# Altium PCB det.PcbDoc
Units mm, origin at the board's own origin, x right, y up, seen from the top; angles counter-clockwise.
Board outline 25 x 21 mm, 2 copper layers (Top Layer, Bottom Layer), stack 0.581 mm thick; 16 components, 7 nets, 43 pads, 27 vias.
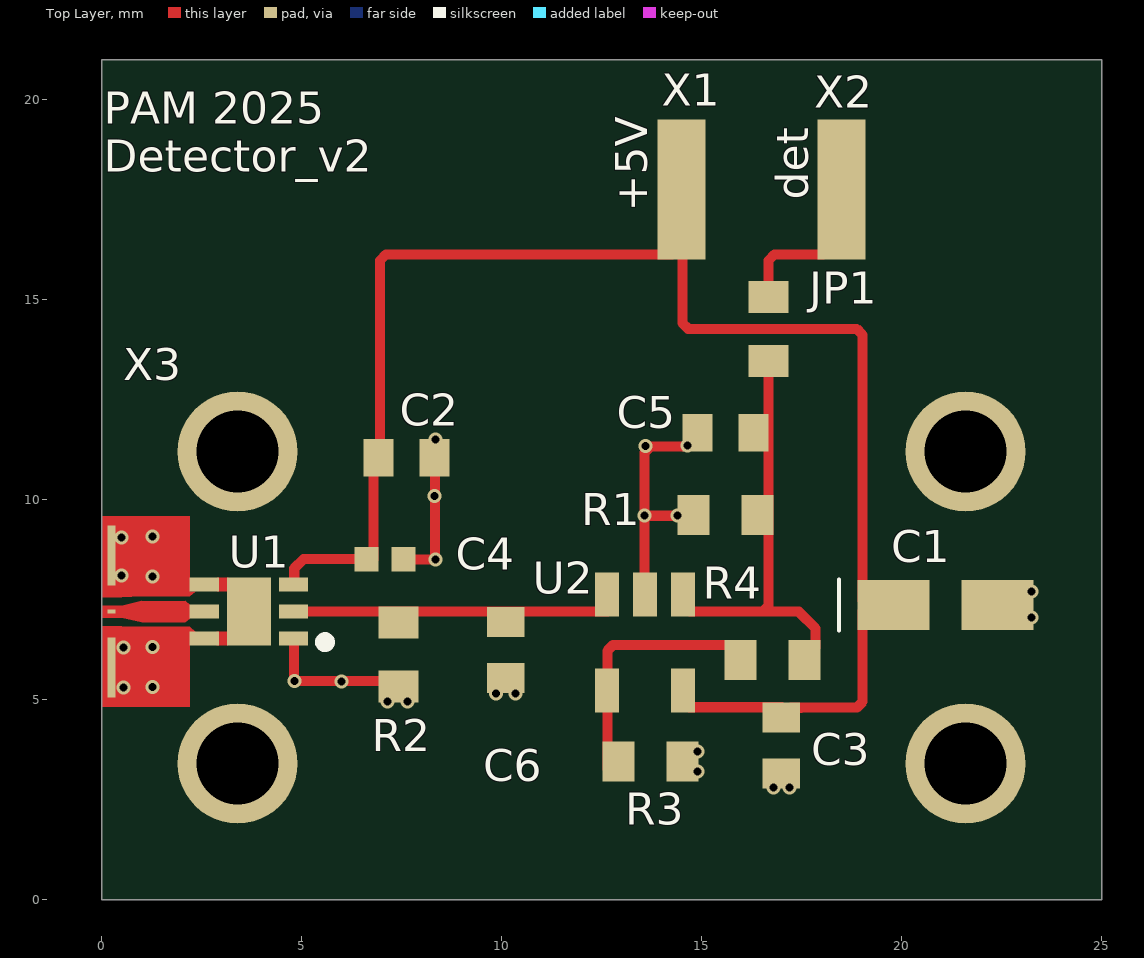
[diagram p0: Top Layer view]
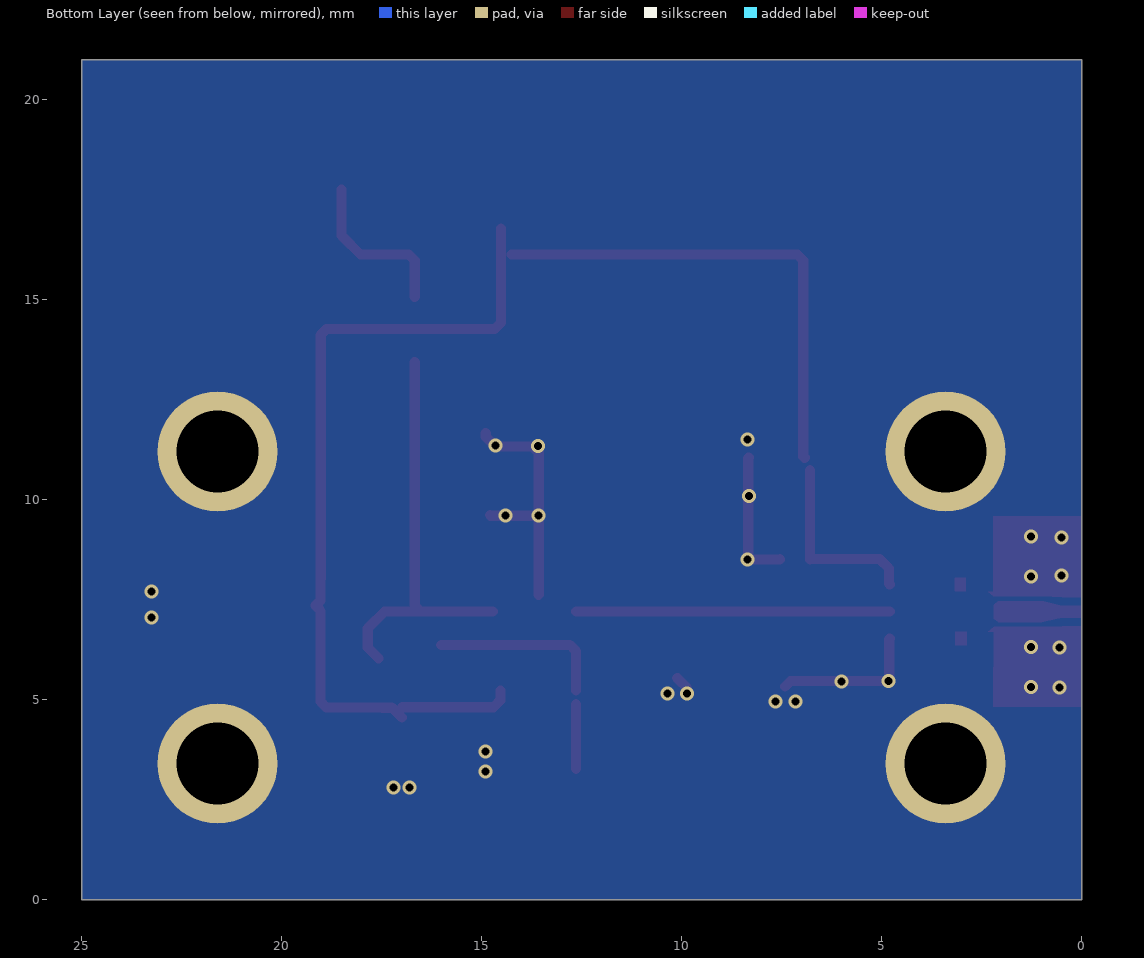
[diagram p1: Bottom Layer view, seen from below]
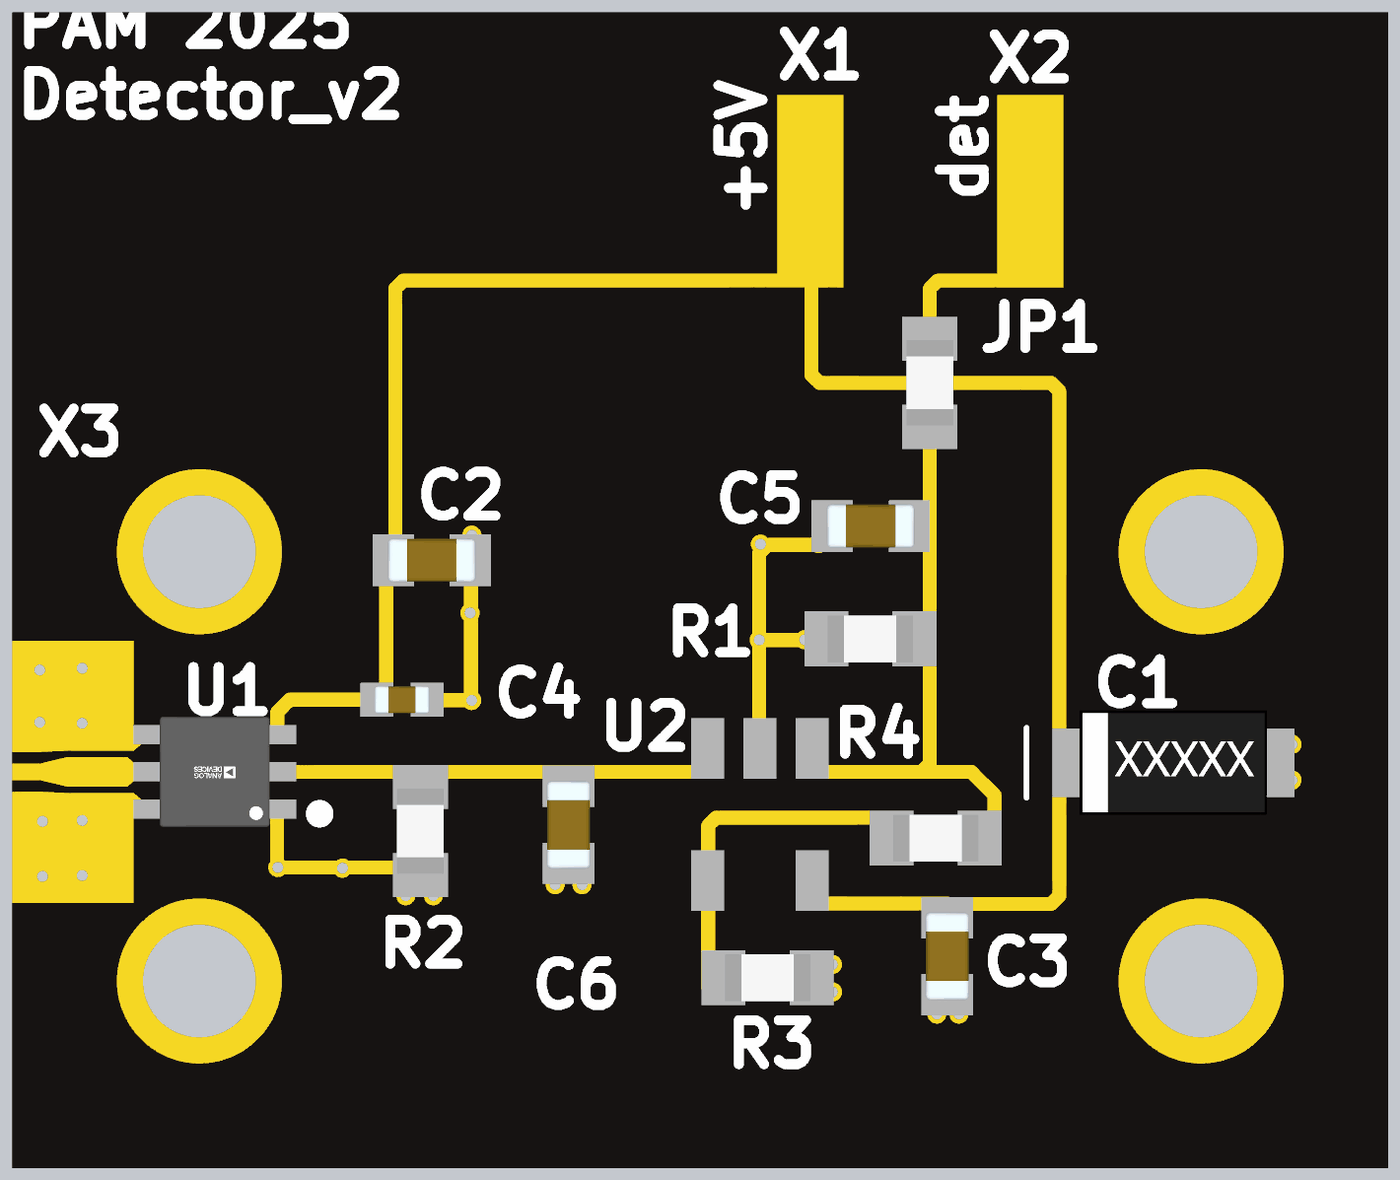
[diagram p2: 3D render of the assembled board from above, using the file's embedded part models]

## Layer stack, top to bottom
Top Layer: signal copper 0.0356
Dielectric 1: dielectric 0.51, Rogers 4350B, Dk 3.48
Bottom Layer: signal copper 0.0356

## Board outline
0,0 25,0 25,21 0,21

## Design rules (kind name [scope] priority, off if disabled: settings)
Clearance [All] p1: gap=0.1 ignorepadtopadclearanceinfootprint=FALSE
HoleSize [All] p1: absolutevalues=TRUE maxlimit=5 minlimit=0.01 maxpercent=80.000 minpercent=20.000
MinimumSolderMaskSliver [All] p1: minsoldermaskwidth=0.15
PolygonConnect [All] p1: connectstyle=Direct reliefconductorwidth=0.254 reliefentries=4 polygonreliefangle="90 Angle" airgapwidth=0.254
RoutingVias [All] p1: holewidth=0.711 width=1.27 viastyle="Through Hole" minholewidth=0.1 minwidth=0.01 maxholewidth=5 maxwidth=5
SilkToSilkClearance [All] p1: silktosilkclearance=0.15
SilkToSolderMaskClearance [IsPad] p1: minsilkscreentomaskgap=0.15 clearancetoexposedcopper=TRUE
SolderMaskExpansion [All] p1: expansion=0.102 istentingtop=FALSE
SupplyNets "Schematic Supply Nets" [InNet('GND')] p1: voltage=0.000
Width [All] p1: maxlimit=0.254 minlimit=0.254 preferedwidth=0.254
26 further rules are at their usual default settings.

## Components (designator, comment, footprint, x,y, rotation, side; value= is the part's Value field where it differs from the comment)
C1 "4.7 uF" C4_7UF 21.097,7.365 r0 top value=4.7uF
C2 "100nF" C1000PF__C100NF 7.622,11.045 r0 top
C3 "100nF" C1000PF__C100NF 16.989,3.85 r270 top
C4 "100 pF" C100PF 7.081,8.51 r0 top
C5 "100nF" C1000PF__C100NF 15.597,11.667 r180 top
C6 "100nF" C1000PF__C100NF 10.108,6.238 r270 top
JP1 "MCT06030Z0000ZP500" JP_R_MCT06030Z0000ZP500 16.67,14.268 r90 top value=0R
R1 "1kOhm" JP_R_MCT06030Z0000ZP500 15.591,9.615 r180 top value=1kR
R2 "1kOhm" JP_R_MCT06030Z0000ZP500 7.416,6.125 r270 top value=1kR
R3 "2kOhm" JP_R_MCT06030Z0000ZP500 13.724,3.459 r0 top value=1kR
R4 "2kOhm" JP_R_MCT06030Z0000ZP500 16.777,5.994 r0 top value=1kR
U1 "ADL6010" DET_ADL6010ACPZN-R2 3.68,7.2 r180 top
U2 "AD8065" OPAMP_AD8065ARTZ-REEL7 13.581,6.423 r270 top
X1 "Solder Pad" "SOLDER PAD" 14.5,17.75 r0 top
X2 "Solder Pad" "SOLDER PAD" 18.5,17.75 r180 top
X3 "Solder Pad" "CPW EDGE CONNECTOR" 0.25,7.2 r90 top

## Footprints (in the part's own frame and the unit in brackets; to place one, negate y for a bottom-side part, rotate by r counter-clockwise, add the part's x,y. Pads: shape width x height; smd on the part's side, far side on the other; paste and mask are expansions set on the pad)
C4_7UF [mm]
  rect 1.8x1.25 smd: 1(-1.3,0) 2(1.3,0)
  silkscreen extent -2.67,-0.64 -2.67,0.64, body extent -1.7,-0.95 1.7,0.95, height 1.84
C100PF [mm]
  rect 0.6x0.62 smd: 1(-0.46,0) 2(0.46,0)
  body extent -0.5,-0.25 0.5,0.25, height 0.55
C1000PF__C100NF [mm]
  rect 0.75x0.94 smd: 1(-0.7,0) 2(0.7,0)
  body extent -0.8,-0.4 0.8,0.4, height 0.9
"CPW EDGE CONNECTOR" [mm]
  rect 0.1x0.2 smd paste-2539.97: 1(0,0)
  rect 1.5x0.2 smd paste-2539.97: 2(-1.4,0) 3(1.4,0)
  Top Layer region: 2.383,0.25 0.361,0.25 0.361,-0.25 0.383,-0.75 2.383,-0.75
  Top Layer region: -0.15,0.25 0.15,0.25 0.15,-0.25 0.269,-0.75 -0.269,-0.75 -0.15,-0.25
  Top Layer region: -2.383,0.25 -0.361,0.25 -0.361,-0.25 -0.383,-0.75 -2.383,-0.75
DET_ADL6010ACPZN-R2 [mm]
  rect 0.73x0.35 smd paste+0 mask+0: 1(-1.115,0.675) 2(-1.115,0) 3(-1.115,-0.675) 4(1.115,-0.675) 5(1.115,0) 6(1.115,0.675)
  rect 1.1x1.7 smd paste+0 mask+0: 7(0,0)
  Top Layer region: 0.516,0.5 0.814,0.5 0.814,0.85 0.516,0.85
  Top Layer region: 0.502,-0.85 0.793,-0.85 0.793,-0.5 0.502,-0.5
  silkscreen extent -2.03,0.64 -1.78,0.89, body extent -1.68,-1.15 1.68,1.15, height 0.25
JP_R_MCT06030Z0000ZP500 [mm]
  rect 0.8x1 smd: 1(-0.8,0) 2(0.8,0)
  body extent -0.77,-0.43 0.78,0.42, height 0.46
OPAMP_AD8065ARTZ-REEL7 [mm] "SOT-23, 5-Leads, Body 2.9x1.6mm, Pitch 0.95mm, IPC Medium Density"
  rect 1.1x0.6 smd: 1(-1.2,0.95) 2(-1.2,0) 3(-1.2,-0.95) 4(1.2,-0.95) 5(1.2,0.95)
  body extent -0.85,-1.5 0.85,1.5, height 1.45
"SOLDER PAD" [mm]
  rect 1.2x3.5 smd paste-2539.97: 1(0,0)

## Part data
C1: library part C7_4uF_TH3A475K010C2900, "Tantalum Capacitor, Polarized, Tantalum (dry/solid), 10V, 10% +Tol, 10% -Tol, 4.7uF, Surface Mount, 1306", Capacitor Type=Tantalum, Case/Package=1206, ESR (Equivalent Series Resistance)=2.9R, Leakage Current=500nA, Manufacturer="Vishay Sprague", Manufacturer Part Number=TH3A475K010C2900, Max Operating Temperature=150°C, Min Operating Temperature=-55°C, Package Shape=Rectangular, Package Style=SMTMeter, Rated DC Voltage (URdc)=10V, Ripple Current=160mA, Supplier Part Number=4924098, Tolerance  (fill in as +-)=10%, Category="Tantalum Capacitors", ComponentLink1Description=https://datasheet.ciiva.com:443/pdfs/VipMasterIC/IC/VISH/VISH-S-A0010085390/VISH-S-A0010085390-1.pdf?src-supplier=IHS+Markit, ComponentLink1URL=https://datasheet.ciiva.com:443/pdfs/VipMasterIC/IC/VISH/VISH-S-A0010085390/VISH-S-A0010085390-1.pdf?src-supplier=IHS+Markit, ComponentLink2Description=https://datasheet.ciiva.com/268/th3-268785.pdf?src-supplier=Digikey, ComponentLink2URL=https://datasheet.ciiva.com/268/th3-268785.pdf?src-supplier=Digikey, ComponentLink3Description=https://datasheet.ciiva.com/16360/th3-16360891.pdf?src-supplier=Future+Electronics, ComponentLink3URL=https://datasheet.ciiva.com/16360/th3-16360891.pdf?src-supplier=Future+Electronics, Dielectric Material=Tantalum, Height=1.6mm, JESD-609 Code=e3, Length=3.2mm, Mounting Technology="Surface Mount", Packaging="Tape and Reel", Pins=2, Polarity=Polarized, Pricing="2000=0.178, 4000=0.175, 6000=0.173, 8000=0.171, 10000=0.166 (USD)", Reach SVHC Compliant=Yes, Reference Standard=AEC-Q200, RoHS=Yes, RoHS Compliant=Yes, Stock=2000, Supplier="Future Electronics", Tan Delta=0.06, Terminal Finish=Tin, Termination="J BEND", Tolerance (fill in as +-)=10%, Width=1.6mm
C2 C3 C5 C6: library part C100nF_GCM188R71C104KA37J, "Ceramic Capacitor, Multilayer, Ceramic, 16V, 10% +Tol, 10% -Tol, X7R, 15% TC, 0.1uF, Surface Mount, 0603", Capacitor Type=Ceramic, Case/Package=0603, Manufacturer=Murata, Manufacturer Part Number=GCM188R71C104KA37J, Max Operating Temperature=125°C, Min Operating Temperature=-55°C, Package Shape=Rectangular, Package Style=SMTMeter, Rated DC Voltage (URdc)=16V, Supplier Part Number=81-GCM188R71C104KA7J, Temperature Characteristics Code=X7R, Tolerance  (fill in as +-)=10%, Category="Ceramic Capacitors", ComponentLink1Description=https://datasheet.ciiva.com:443/pdfs/VipMasterIC/IC/MURE/MURE-S-A0004370842/MURE-S-A0004371613-1.pdf?src-supplier=IHS+Markit, ComponentLink1URL=https://datasheet.ciiva.com:443/pdfs/VipMasterIC/IC/MURE/MURE-S-A0004370842/MURE-S-A0004371613-1.pdf?src-supplier=IHS+Markit, ComponentLink2Description=https://datasheet.ciiva.com/18183/getdatasheetpartid-140967-18183600.pdf?src-supplier=Verical, ComponentLink2URL=https://datasheet.ciiva.com/18183/getdatasheetpartid-140967-18183600.pdf?src-supplier=Verical, ComponentLink3Description=https://datasheet.ciiva.com/29540/product-29540843.pdf?src-supplier=Digikey, ComponentLink3URL=https://datasheet.ciiva.com/29540/product-29540843.pdf?src-supplier=Digikey, ComponentLink4Description=https://datasheet.ciiva.com/29540/product-29540844.pdf?src-supplier=Digikey, ComponentLink4URL=https://datasheet.ciiva.com/29540/product-29540844.pdf?src-supplier=Digikey, ComponentLink5Description=https://datasheet.ciiva.com/29540/product-29540842.pdf?src-supplier=Digikey, ComponentLink5URL=https://datasheet.ciiva.com/29540/product-29540842.pdf?src-supplier=Digikey, Dielectric Material=Ceramic, Height=0.9mm, JESD-609 Code=e3, Length=1.6mm, Mounting Technology="Surface Mount", Multilayer=Yes, Packaging="Tape and Reel", Pins=2, Pricing="1=0.17, 10=0.097, 50=0.097, 100=0.063, 1000=0.044, 10000=0.031 (USD)", Reach SVHC Compliant=Yes, Reference Standard=AEC-Q200, RoHS=Yes, RoHS Compliant=Yes, Stock=1116664, Supplier=Mouser, Terminal Finish=Nickel, Termination=Wraparound, Tolerance (fill in as +-)=10%, Width=0.8mm
C4: library part C100pF_GRM1555C2A101FA01D, "Multilayer Ceramic Capacitors MLCC - SMD/SMT 100 pF 100 VDC 1% 0402 C0G (NP0)", Manufacturer=Murata, Manufacturer Part Number=GRM1555C2A101FA01D, Supplier Part Number=81-GRM1555C2A11FA1D, Pricing="1=0.18, 10=0.119, 50=0.119, 100=0.06, 1000=0.039, 10000=0.035 (USD)", RoHS=No, Stock=21646, Supplier=Mouser
JP1: library part JP_small_MCT06030Z0000ZP500, "Fixed Resistor, Thin Film, 0.1W, 0ohm, Surface Mount, 0603", Case/Package=0603, Manufacturer="Vishay Beyschlag", Max Operating Temperature=125°C, Min Operating Temperature=-55°C, Package Height=0.45mm, Package Length=1.55mm, Package Shape=Rectangular, Package Width=0.85mm, Power=100mW, Rated Temperature=70°C, Resistor Type="FIXED RESISTOR", Supplier Part Number=594-MCT06030Z0000ZP5, Category="Chip SMD Resistors", ComponentLink1Description=https://datasheet.ciiva.com:443/pdfs/VipMasterIC/IC/VISH/VISH-S-A0002473667/VISH-S-A0002473667-1.pdf?src-supplier=IHS+Markit, ComponentLink1URL=https://datasheet.ciiva.com:443/pdfs/VipMasterIC/IC/VISH/VISH-S-A0002473667/VISH-S-A0002473667-1.pdf?src-supplier=IHS+Markit, ComponentLink2Description=https://datasheet.ciiva.com/48524/mc-pro-48524221.pdf?src-supplier=Avnet, ComponentLink2URL=https://datasheet.ciiva.com/48524/mc-pro-48524221.pdf?src-supplier=Avnet, ComponentLink3Description=https://datasheet.ciiva.com/8901/mc-pro-8901833.pdf?src-supplier=Avnet, ComponentLink3URL=https://datasheet.ciiva.com/8901/mc-pro-8901833.pdf?src-supplier=Avnet, ComponentLink4Description=https://datasheet.ciiva.com/8898/mc-pro-8898078.pdf?src-supplier=Avnet, ComponentLink4URL=https://datasheet.ciiva.com/8898/mc-pro-8898078.pdf?src-supplier=Avnet, ComponentLink5Description=https://datasheet.ciiva.com/2471/mc-pro-2471991.pdf?src-supplier=Digikey, ComponentLink5URL=https://datasheet.ciiva.com/2471/mc-pro-2471991.pdf?src-supplier=Digikey, ComponentLink6Description=https://datasheet.ciiva.com/2471/mc-pro-2471992.pdf?src-supplier=Digikey, ComponentLink6URL=https://datasheet.ciiva.com/2471/mc-pro-2471992.pdf?src-supplier=Digikey, ComponentLink7Description=https://datasheet.ciiva.com/2471/mc-pro-2471993.pdf?src-supplier=Digikey, ComponentLink7URL=https://datasheet.ciiva.com/2471/mc-pro-2471993.pdf?src-supplier=Digikey, ComponentLink8Description=https://datasheet.ciiva.com/16451/mc-pro-16451398.pdf?src-supplier=Future+Electronics, ComponentLink8URL=https://datasheet.ciiva.com/16451/mc-pro-16451398.pdf?src-supplier=Future+Electronics, Construction=Rectangular, JESD-609 Code=e3, Manufacturer Part Number=MCT06030Z0000ZP500, Mounting Technology="Surface Mount", Packaging="Tape and Reel", Pins=2, Pricing="1=0.24, 10=0.09, 50=0.09, 100=0.063, 1000=0.04, 10000=0.028 (USD)", Reach SVHC Compliant=Yes, Reference Standard=CECC40401-801, RoHS=Yes, RoHS Compliant=Yes, Stock=102669, Supplier=Mouser, Technology="THIN FILM", Terminal Finish=Nickel, Termination=Wraparound
R1 R2 R3 R4: library part R_1kOhm_MCT06030C1001FPW00, "Fixed Resistor, Thin Film, 0.1W, 1000ohm, 75V, 1% +/-Tol, 50ppm/Cel, Surface Mount, 0603", Case/Package=0603, Manufacturer="Vishay BCcomponents", Manufacturer Part Number=MCT06030C1001FPW00, Max Operating Temperature=125°C, Min Operating Temperature=-55°C, Package Height=0.45mm, Package Length=1.55mm, Package Shape=Rectangular, Package Width=0.85mm, Power=100mW, Rated Temperature=70°C, Resistor Type="FIXED RESISTOR", Supplier Part Number=594-MCT06030C1001FPW, Temperature Coefficient (ppm/Cel)=50, Tolerance=1%, Working Voltage=75V, Category="Chip SMD Resistors", ComponentLink1Description=https://datasheet.ciiva.com:443/pdfs/VipMasterIC/IC/VISH/VISH-S-A0002473667/VISH-S-A0002473667-1.pdf?src-supplier=IHS+Markit, ComponentLink1URL=https://datasheet.ciiva.com:443/pdfs/VipMasterIC/IC/VISH/VISH-S-A0002473667/VISH-S-A0002473667-1.pdf?src-supplier=IHS+Markit, ComponentLink2Description=http://components.arrow.com/part/dataview/43585914S9217422N4052?src-supplier=Arrow+Electronics, ComponentLink2URL=http://components.arrow.com/part/dataview/43585914S9217422N4052?src-supplier=Arrow+Electronics, ComponentLink3Description=https://datasheet.octopart.com/MCT06030C1001FPW00-Vishay-datasheet-81842982.pdf?src-supplier=Future+Electronics, ComponentLink3URL=https://datasheet.octopart.com/MCT06030C1001FPW00-Vishay-datasheet-81842982.pdf?src-supplier=Future+Electronics, Construction=Rectangular, JESD-609 Code=e3, Mounting Technology="Surface Mount", Packaging="Tape and Reel", Pins=2, Pricing="1=0.1, 10=0.039, 50=0.039, 100=0.035, 1000=0.021, 10000=0.014 (USD)", Reach SVHC Compliant=Yes, Reference Standard=CECC40401-801, RoHS=Yes, RoHS Compliant=Yes, Stock=43742, Supplier=Mouser, Technology="THIN FILM", Terminal Finish=Nickel, Termination=Wraparound
U1: library part det_ADL6010ACPZN-R2, "Linear Detector, 500MHz Min, 43500MHz Max, 20dBm Input Power-Max", Manufacturer="Analog Devices", Manufacturer Part Number=ADL6010ACPZN-R2, Supplier Part Number=584-ADL6010ACPZN-R2, Category="RF Semiconductors and Devices", ComponentLink1Description=https://datasheet.ciiva.com:443/pdfs/VipMasterIC/IC/ANDI/ANDI-S-A0008998713/ANDI-S-A0008998713-1.pdf?src-supplier=IHS+Markit, ComponentLink1URL=https://datasheet.ciiva.com:443/pdfs/VipMasterIC/IC/ANDI/ANDI-S-A0008998713/ANDI-S-A0008998713-1.pdf?src-supplier=IHS+Markit, ComponentLink2Description=https://datasheet.ciiva.com/29985/adl6010-29985760.pdf?src-supplier=Avnet, ComponentLink2URL=https://datasheet.ciiva.com/29985/adl6010-29985760.pdf?src-supplier=Avnet, Pricing="1=162.98, 10=153.49, 50=153.49, 100=153.49, 1000=153.49, 10000=153.49 (USD)", Reach SVHC Compliant=Yes, RF/Microwave Device Type="LINEAR DETECTOR", RoHS=Yes, RoHS Compliant=Yes, Stock=808, Supplier=Mouser
U2: library part opAmp_AD8065ARTZ-REEL7, "Operational Amplifier, 1 Func, BIPolar, PDSO5", Case/Package=LSSOP, Manufacturer="Analog Devices", Manufacturer Part Number=AD8065ARTZ-REEL7, Max Operating Temperature=85°C, Max Supply Voltage=12V, Min Operating Temperature=-40°C, Min Supply Voltage=2.5V, Package Body Material=Plastic, Package Shape=Rectangular, Package Style="SMALL OUTLINE, LOW PROFILE, SHRINK PITCHMeter", Peak Reflow Temperature (Cel)=260°C, Supplier Part Number=584-AD8065ARTZ-R7, Temperature Grade=INDUSTRIAL, Time @ Peak Reflow Temperature-Max (s)=40s, Bandwidth-Nom=145MHz, Category="Amplifiers - Op Amps, Buffer, Instrumentation", Channels=1, ComponentLink1Description=https://datasheet.ciiva.com:443/pdfs/VipMasterIC/IC/ANDI/ANDI-S-A0007455537/ANDI-S-A0007455537-1.pdf?src-supplier=IHS+Markit, ComponentLink1URL=https://datasheet.ciiva.com:443/pdfs/VipMasterIC/IC/ANDI/ANDI-S-A0007455537/ANDI-S-A0007455537-1.pdf?src-supplier=IHS+Markit, ComponentLink2Description=https://datasheet.ciiva.com/1794/ad8065-8066-1794192.pdf?src-supplier=Digikey, ComponentLink2URL=https://datasheet.ciiva.com/1794/ad8065-8066-1794192.pdf?src-supplier=Digikey, ComponentLink3Description=https://datasheet.ciiva.com/46387/1906158-46387195.pdf?src-supplier=Element14, ComponentLink3URL=https://datasheet.ciiva.com/46387/1906158-46387195.pdf?src-supplier=Element14, ComponentLink4Description=https://datasheet.ciiva.com/8078/1906158-8078715.pdf?src-supplier=Element14, ComponentLink4URL=https://datasheet.ciiva.com/8078/1906158-8078715.pdf?src-supplier=Element14, ComponentLink5Description=https://datasheet.ciiva.com/28388/1906158-28388634.pdf?src-supplier=Element14, ComponentLink5URL=https://datasheet.ciiva.com/28388/1906158-28388634.pdf?src-supplier=Element14, ComponentLink6Description=https://datasheet.ciiva.com/1794/ad8065-8066-1794191.pdf?src-supplier=Digikey, ComponentLink6URL=https://datasheet.ciiva.com/1794/ad8065-8066-1794191.pdf?src-supplier=Digikey, ComponentLink7Description=https://datasheet.ciiva.com/1794/ad8065-8066-1794193.pdf?src-supplier=Digikey, ComponentLink7URL=https://datasheet.ciiva.com/1794/ad8065-8066-1794193.pdf?src-supplier=Digikey, ComponentLink8Description=https://datasheet.ciiva.com/2972/ad8065-8066-2972973.pdf?src-supplier=Avnet, ComponentLink8URL=https://datasheet.ciiva.com/2972/ad8065-8066-2972973.pdf?src-supplier=Avnet, ComponentLink9Description=https://datasheet.ciiva.com/15410/ad8065-8066-246489-15410250.pdf?src-supplier=Mouser, ComponentLink9URL=https://datasheet.ciiva.com/15410/ad8065-8066-246489-15410250.pdf?src-supplier=Mouser, ComponentLink10Description=https://datasheet.ciiva.com/48709/001248924-da-01-en-ic-opamp-v-ad8065artz-reel7-sot-23-5-adi-48709574.pdf?src-supplier=Conrad, ComponentLink10URL=https://datasheet.ciiva.com/48709/001248924-da-01-en-ic-opamp-v-ad8065artz-reel7-sot-23-5-adi-48709574.pdf?src-supplier=Conrad, Consumer IC Type="VIDEO AMPLIFIER", Height - Seated (Max)=1.45mm, JESD-30 Code=R-PDSO-G5, JESD-609 Code=e3, Length=2.9mm, Moisture Sensitivity Level=1, Number of Channels=1, Pins=5, Pricing="1=6.36, 10=3.77, 50=3.77, 100=3.13, 1000=2.6, 10000=2.59 (USD)", Qualification Status="Not Qualified", Reach SVHC Compliant=Yes, RoHS=Yes, RoHS Compliant=Yes, Stock=85532, Supplier=Mouser, Surface Mount=Yes, Technology=BIPOLAR, Terminal Finish=Tin, Terminal Form="Gull Wing", Terminal Pitch=0.95mm, Terminal Position=DUAL, Width=1.6mm
X1 X2: "Pad to solder wires to"
X3: library part "RF  CPW Solder Pad", "Solder pad for RF Coplanar Waveguide Rogers 4350B Thickness 0.020\" Copper 1oz"

## Free pads (board coordinates)
  round 3 hole 2.05 mask-2539.97: 1(3.4,3.4) 1(3.4,11.2) 1(21.6,3.4) 1(21.6,11.2)

## Via types
v1: diameter 0.35, hole 0.2, Top Layer to Bottom Layer, 27 vias

## Nets (pads, with @x,y where several pads share a name; then routed paths per layer and width w, separated by ;. In a path a pad name is that pad's centre, name@x,y a point inside that pad or via, vN(x,y) a via of type N, cw(c..) or ccw(c..) an arc to the next point about the centre after c; other vN are vias at no path point)
+5V: C1.1 C2.1 C3.1 C4.1 U1.3 U2.5 X1.1 | length 38.3
  Top Layer w0.254: U1.3 4.814,7.894 4.814,8.282 5.045,8.513 C4.1@6.786,8.513 ; C4.1@6.794,8.505 C2.1@6.794,10.741 ; C2.1 6.958,11.081 6.958,15.978 7.107,16.127 X1.1@14.257,16.127 ; X1.1@14.518,16.777 14.518,14.417 14.667,14.268 18.875,14.268 19.023,14.119 19.023,8.012 ; U2.5 14.531,4.981 14.704,4.808 C3.1@16.989,4.808 ; C3.1 17.237,4.798 17.479,4.798 17.481,4.8 18.877,4.8 19.025,4.949 19.025,7.219 19.157,7.351 19.024,7.484 19.024,8.011
det: JP1.2 X2.1 | length 4.1
  Top Layer w0.254: JP1.2 16.67,15.978 16.819,16.127 18.027,16.127 18.5,16.6 X2.1
GND: C1.2 C2.2 C3.2 C4.2 C5.2 C6.2 pad.1 R1.2 R2.2 R3.2 U1.1 U1.4 U1.6 U1.7 U2.2 X3.2 X3.3 | length 13.8
  Top Layer w0.254: U1.1 4.81,6.51 4.81,5.478 v1(4.825,5.463) 7.278,5.463 R2.2 ; C4.2 7.547,8.504 8.341,8.504 v1(8.347,8.498) ; C2.2 8.334,11.033 v1@8.334,8.51 ; v1(9.864,5.152) 9.864,5.294 C6.2 ; v1(13.572,9.597) 13.571,7.632 U2.2 ; v1@14.518,11.324 13.721,11.324 13.572,11.175 v1(13.572,9.597) 14.773,9.597 R1.2 ; C5.2@14.649,11.324 14.897,11.572 C5.2
  other v1: 16.8,2.8 17.2,2.8 14.9,3.2 14.9,3.7 7.15,4.95 7.65,4.95 10.352,5.151 0.55,5.3 1.27,5.317 6,5.45 0.55,6.3 1.27,6.317 23.25,7.05 23.25,7.7 1.27,8.083 0.5,8.1 0.5,9.05 1.27,9.083 14.4,9.6 8.318,10.088 13.594,11.337 14.65,11.35 8.35,11.5
NetR3_1: R3.1 R4.1 U2.4 | length 6
  Top Layer w0.254: U2.4@12.643,5.235 12.643,6.219 12.792,6.368 R4.1@16.009,6.368 ; R3.1@12.644,3.268 U2.4@12.644,4.887
RFin: U1.5 X3.1
U1: C6.1 R2.1 U1.2 U2.3 | length 7.8
  Top Layer w0.254: U1.2 10.038,7.2 U2.3@12.641,7.2
U2: C5.1 JP1.1 R1.1 R4.2 U2.1 | length 10.5
  Top Layer w0.254: U2.1@14.712,7.2 16.521,7.2 ; JP1.1@16.67,13.439 16.67,7.349 16.521,7.2 ; R4.2@17.577,6.035 17.846,6.304 17.846,6.782 17.428,7.2 16.521,7.2

## Polygon pours and split planes (outlines as drawn)
GND on Bottom Layer "GND_L02_P003" (solid, pour order 3): 0,0 25,0 25,21 0,21

## Other copper
Top Layer:
  rectangle net RFin: 1,6.931 2.09,7.469
  region net RFin: 2.09,7.469 2.201,7.375 2.201,7.025 2.09,6.931
  region net GND: 2.206,7.583 2.206,7.701 2.346,7.701
  region net GND: 2.203,6.817 2.203,6.699 2.343,6.699
  region net GND: 0.871,9.583 2.206,9.583 2.206,7.583 0.871,7.583
  region net GND: 0.871,6.817 2.203,6.817 2.203,4.817 0.871,4.817

## Silkscreen, mask and mechanical layers (free items; w line width, h text height)
Top Overlay:
  text "PAM 2025 / Detector_v2" at 0.05,18.2 h0.8
  text "det" at 17.66,17.492 h0.8 r90
  text "+5V" at 13.64,17.196 h0.8 r90
Top Solder:
  circle w1.5: c3.4,3.4 r0.75
  circle w1.5: c3.4,11.2 r0.75
  circle w1.5: c21.6,3.4 r0.75
  circle w1.5: c21.6,11.2 r0.75
  region: 0,0 25,0 25,21 0,21
Bottom Solder:
  circle w1.5: c3.4,3.4 r0.75
  circle w1.5: c3.4,11.2 r0.75
  circle w1.5: c21.6,3.4 r0.75
  circle w1.5: c21.6,11.2 r0.75
  region: 0,0 25,0 25,21 0,21
Board:
  the board outline again, w0.1